# EAGLE board TSOC_PSoC4L (EAGLE 6.6.0)
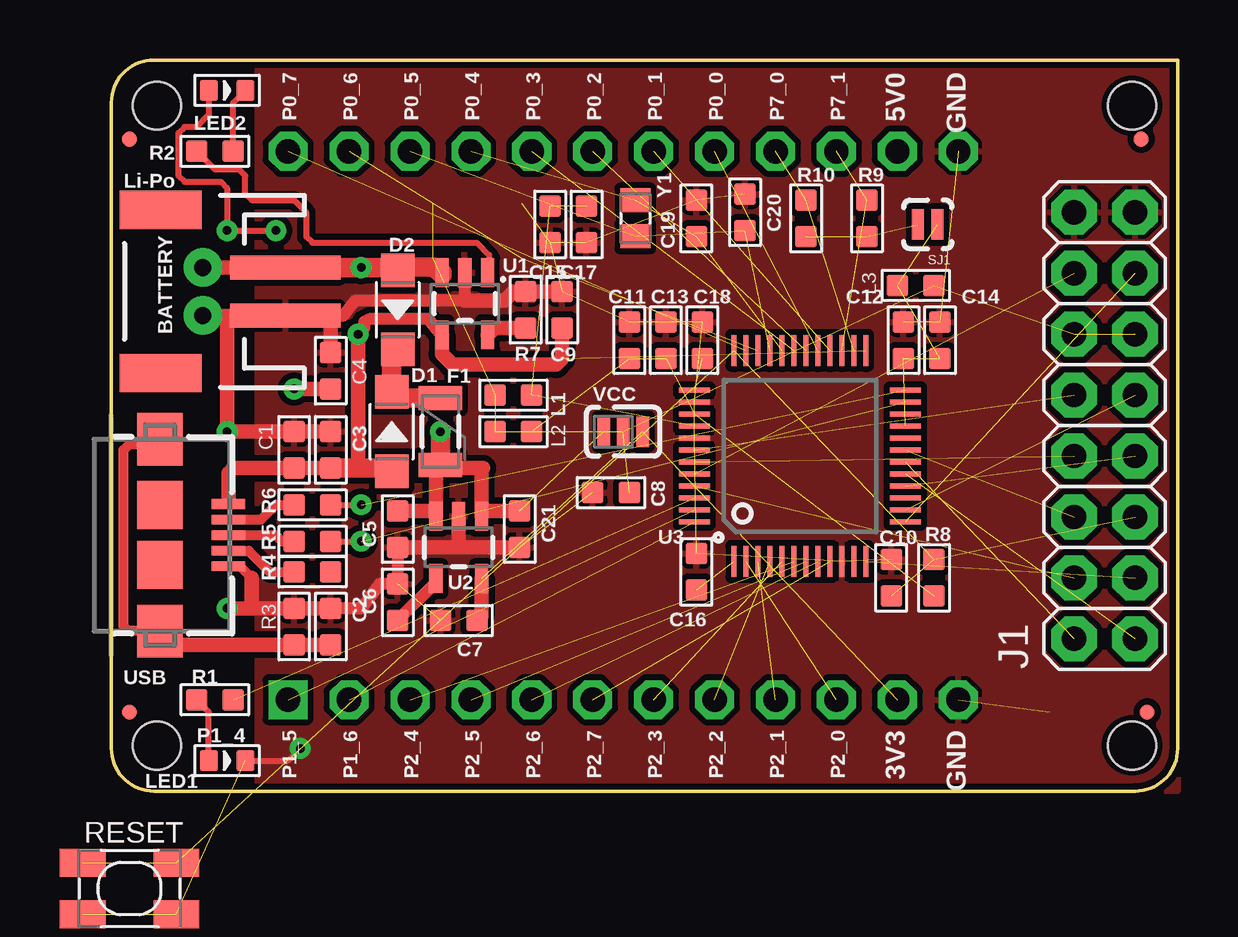
[diagram p0: board, top side]
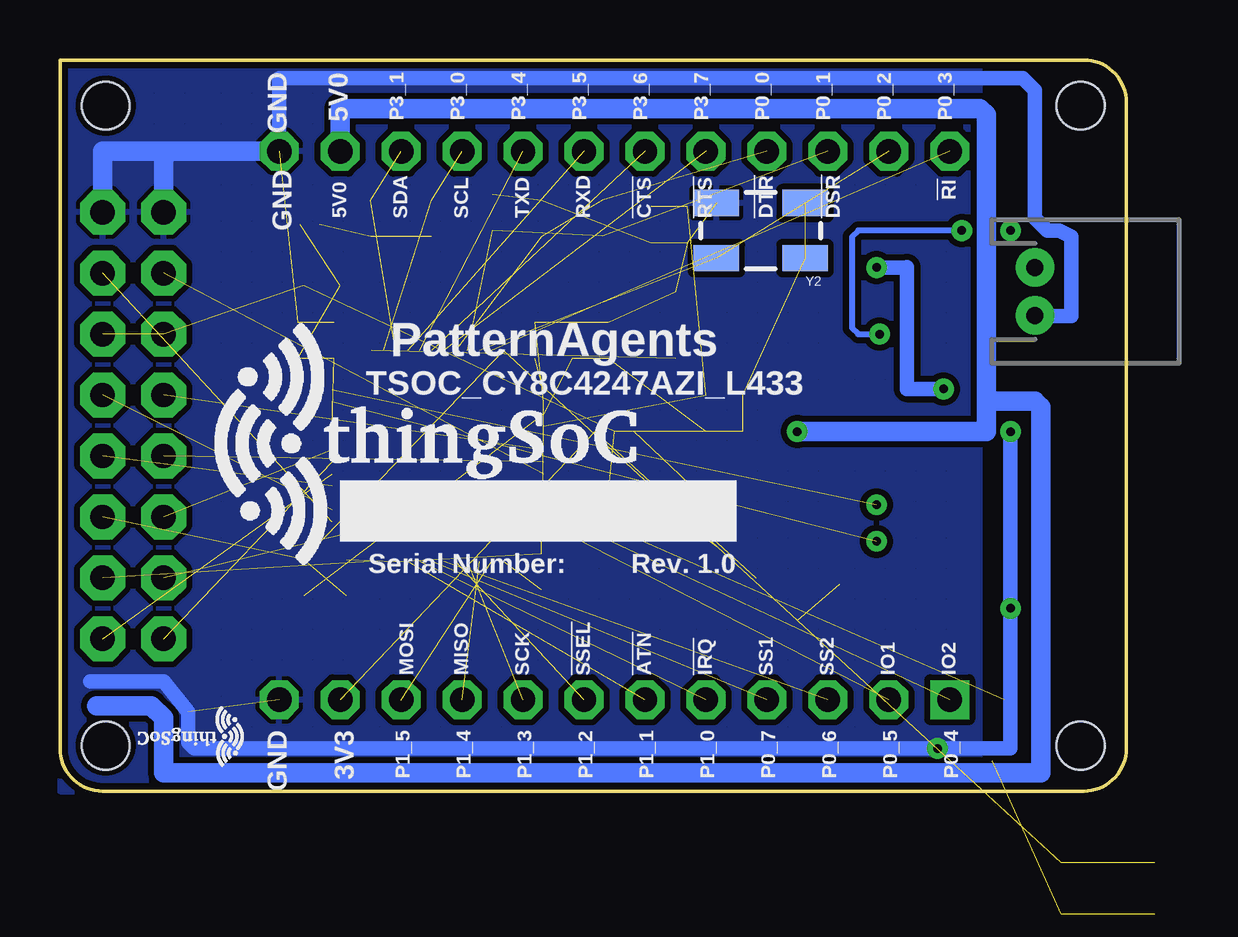
[diagram p1: board, bottom side, seen from below]

Size 44.45 x 30.48 mm. Coordinates in mm from the lower left corner, seen from the top.
Copper layers (1*16): Top 0.035mm / dielectric 1.5mm / Bottom 0.035mm
Design rules "PatternAgents_7mil": minimum track width 7mil, minimum drill 14mil, track to track 7mil, track to pad 7mil, pad to pad 7mil, via to via 7mil, smd to smd 7mil, copper to edge 7mil, drill to drill 7mil, minimum pad ring 12mil, minimum via ring 10mil, stop-mask expansion 4mil, vias tented up to drill 25mil, thermal gap 7mil
Net classes: 1 vcc: width 0.254 mm

## Footprints (pad centres in the part's own frame; a part is rotated, then mirrored left to right if it is on the bottom)
TSOC-BB-S24 = drill 1.016 square: 1B -11.43,11.43 | drill 1.016 octagon: 1C 11.43,11.43; 2B -11.43,8.89; 2C 11.43,8.89; 3B -11.43,6.35; 3C 11.43,6.35; 4B -11.43,3.81; 4C 11.43,3.81; 5B -11.43,1.27; 5C 11.43,1.27; 6B -11.43,-1.27; 6C 11.43,-1.27; 7B -11.43,-3.81; 7C 11.43,-3.81; 8B -11.43,-6.35; 8C 11.43,-6.35; 9B -11.43,-8.89; 9C 11.43,-8.89; 10B -11.43,-11.43; 10C 11.43,-11.43; 11B -11.43,-13.97; 11C 11.43,-13.97; 12B -11.43,-16.51; 12C 11.43,-16.51
JST-2-SMD = smd 1 x 4.6: 1 -1,-3.7; 2 1,-3.7 | smd 1.6 x 3.4: NC1 -3.4,1.5; NC2 3.4,1.5
C0603 = smd 0.889 x 0.889: 1 0,0.762; 2 0,-0.762
SOD-123 = smd 1.397 x 1.397: + -1.651,0; - 1.651,0
PTC-1206 = smd 1 x 1.8: 1 -1.4,0; 2 1.4,0
MICRO-FIDUCIAL = smd 0.635 x 0.635: 1 0,0
2X8 = drill 1.016 pad 1.88 octagon: 1 0,0; 2 0,2.54; 3 2.54,0; 4 2.54,2.54; 5 5.08,0; 6 5.08,2.54; 7 7.62,0; 8 7.62,2.54; 9 10.16,0; 10 10.16,2.54; 11 12.7,0; 12 12.7,2.54; 13 15.24,0; 14 15.24,2.54; 15 17.78,0; 16 17.78,2.54
JST-2-PTH-NS = drill 0.7 pad 1.6: 1 -1,0; 2 1,0
L0603 = smd 0.889 x 0.889: 1 -0.762,0; 2 0.762,0
LED-0603 = smd 0.762 x 0.889: + -0.762,0; - 0.762,0
R0603 = smd 0.889 x 0.889: 1 0,0.762; 2 0,-0.762
SW4-SMD-4.2X3.2X2.5MM = smd 1.905 x 1.168: 1 -1.95,1.075; 2 1.95,1.075; 3 -1.95,-1.075; 4 1.95,-1.075
JMP-2-NC = smd 0.508 x 1.27: 1 -0.401,0; 2 0.413,0
SOT23-5 = smd 0.55 x 1.2: 1 -0.95,-1.3; 2 0,-1.3; 3 0.95,-1.3; 4 0.95,1.3; 5 -0.95,1.3
TQFP-7X7-48 = smd 1.3 x 0.21: 1 -4.4,2.75; 2 -4.4,2.25; 3 -4.4,1.75; 4 -4.4,1.25; 5 -4.4,0.75; 6 -4.4,0.25; 7 -4.4,-0.25; 8 -4.4,-0.75; 9 -4.4,-1.25; 10 -4.4,-1.75; 11 -4.4,-2.25; 12 -4.4,-2.75; 25 4.4,-2.75; 26 4.4,-2.25; 27 4.4,-1.75; 28 4.4,-1.25; 29 4.4,-0.75; 30 4.4,-0.25; 31 4.4,0.25; 32 4.4,0.75; 33 4.4,1.25; 34 4.4,1.75; 35 4.4,2.25; 36 4.4,2.75 | smd 0.21 x 1.3: 13 -2.75,-4.4; 14 -2.25,-4.4; 15 -1.75,-4.4; 16 -1.25,-4.4; 17 -0.75,-4.4; 18 -0.25,-4.4; 19 0.25,-4.4; 20 0.75,-4.4; 21 1.25,-4.4; 22 1.75,-4.4; 23 2.25,-4.4; 24 2.75,-4.4; 37 2.75,4.4; 38 2.25,4.4; 39 1.75,4.4; 40 1.25,4.4; 41 0.75,4.4; 42 0.25,4.4; 43 -0.25,4.4; 44 -0.75,4.4; 45 -1.25,4.4; 46 -1.75,4.4; 47 -2.25,4.4; 48 -2.75,4.4
TSOC-BB-BRD-DIM = hole 2: 13.335,16.891; -13.335,16.891; 13.335,-23.749; -13.335,-23.749
USB-AB-MICRO-SMD = smd 1.4 x 0.4: D+ 2.85,0; D- 2.85,0.65; GND 2.85,-1.3; ID 2.85,-0.65; VBUS 2.85,1.3 | smd 1.9 x 2: P$6 0,1.25; P$7 0,-1.25 | smd 1.9 x 2.2: SHIELD1 0,4; SHIELD2 0,-4
JMP-3-1_2 = smd 0.508 x 1.27: 1 -0.813,0; 2 0,0; 3 0.813,0
X2-SMD-L2.0X1.2X0.55MM = smd 1 x 1.25: 1 -0.75,0; 2 0.75,0
CRYSTAL-SMD-5X3 = smd 1.9 x 1.1: 1 -1.85,-1.15; 2 1.85,-1.15; 3 1.85,1.15; 4 -1.85,1.15

## Placement (x,y rotation side)
A  TSOC-24-BB  [TSOC-BB-S24]  18.8,15.24 90 top
BATTERY  [JST-2-SMD]  3.56,20.83 90 top
C1  100nf  [C0603]  7.62,14.22 180 top
C2  100nf  [C0603]  9.14,6.86 180 top
C3  100nf  [C0603]  9.14,14.22 180 top
C4  1uf  [C0603]  9.14,17.53 180 top
C5  100nf  [C0603]  11.94,7.87 180 top
C6  10uf  [C0603]  11.94,10.92 0 top
C7  10uf  [C0603]  14.48,7.11 90 top
C8  10uf  [C0603]  20.83,12.45 90 top
C9  1uf  [C0603]  18.8,20.07 180 top
C10  100nf  [C0603]  32.51,8.89 180 top
C11  1uf  [C0603]  21.59,18.8 180 top
C12  100nf  [C0603]  33.02,18.8 180 top
C13  100nf  [C0603]  23.11,18.8 180 top
C14  1uf  [C0603]  34.54,18.8 180 top
C15  1uf  [C0603]  18.29,23.62 0 top
C16  1uf  [C0603]  24.38,9.14 180 top
C17  100nf  [C0603]  19.81,23.62 0 top
C18  1uf  [C0603]  24.64,18.8 180 top
C19  12pf  [C0603]  24.38,23.88 180 top
C20  12pf  [C0603]  26.42,24.13 180 top
C21  10uf  [C0603]  17.02,10.92 180 top
D1  20V-1A  [SOD-123]  11.68,14.99 90 top
D2  20V-1A  [SOD-123]  11.94,20.07 270 top
F1  500mA-PTC  [PTC-1206]  13.72,14.99 270 top
FID1  FIDUCIALUFIDUCIAL  [MICRO-FIDUCIAL]  0.76,3.3 180 top
FID2  FIDUCIALUFIDUCIAL  [MICRO-FIDUCIAL]  0.76,27.18 180 top
FID3  FIDUCIALUFIDUCIAL  [MICRO-FIDUCIAL]  43.18,3.3 180 top
FID4  FIDUCIALUFIDUCIAL  [MICRO-FIDUCIAL]  42.93,27.18 180 top
J1  [2X8]  42.67,6.35 90 top
J1P  [JST-2-PTH-NS]  3.81,20.83 270 bottom
L1  330OHM-500MA  [L0603]  16.76,16.51 0 top
L2  330OHM-500MA  [L0603]  16.76,14.99 0 top
L3  330OHM-500MA  [L0603]  33.53,21.08 180 top
LED1  GREEN-0603  [LED-0603]  4.83,1.27 0 top
LED2  YELLOW-0603  [LED-0603]  4.83,29.21 0 top
R1  1K 1/10W  [R0603]  4.32,3.81 90 top
R2  1K 1/10W  [R0603]  4.32,26.67 90 top
R3  1M 1/10W  [R0603]  7.62,6.86 180 top
R4  22R  [R0603]  8.38,9.14 90 top
R5  22R  [R0603]  8.38,10.41 90 top
R6  22R  [R0603]  8.38,11.94 90 top
R7  10K 1/10W  [R0603]  17.27,20.07 0 top
R8  10K 1/10W  [R0603]  34.29,8.89 0 top
R9  10K 1/10W  [R0603]  31.5,23.88 0 top
R10  10K 1/10W  [R0603]  28.96,23.88 0 top
RESET  DHT-4235A  [SW4-SMD-4.2X3.2X2.5MM]  0.76,-4.06 0 top
SJ1  JMP-2-NC  [JMP-2-NC]  34.04,23.62 180 top
U1  MCP73831  [SOT23-5]  14.73,20.32 180 top
U2  AP2112K-3.3V  [SOT23-5]  14.48,10.16 180 top
U3  CY8C4247AZI-L433  [TQFP-7X7-48]  28.7,13.97 90 top
U$6  TSOC-PCB-SINGLE  [TSOC-BB-BRD-DIM]  18.8,15.24 90 top
U$100  TSOC-LOGO-SMALL  [TSOC-LOGO-SML]  37.59,2.29 180 bottom
U$101  TSOC-LOGO-LRG  [TSOC-LOGO-LRG]  34.8,14.48 0 bottom
USB  USB_AB  [USB-AB-MICRO-SMD]  2.03,10.67 0 top
VCC  JMP-3-1_2  [JMP-3-1_2]  21.34,14.99 0 top
Y1  3.2768KHZ  [X2-SMD-L2.0X1.2X0.55MM]  21.84,23.88 270 top
Y2  OSCILLATOR5X3  [CRYSTAL-SMD-5X3]  15.24,23.37 180 bottom

## Library data of the parts
A U$6 U$100 U$101 = thingSoC
BATTERY = TSOC-ESP8266-BASE; BTM_NEG: -; BTM_POS: +; PROD_ID: CONN-11443; TOP_NEG: -; TOP_POS: +
C1-C3 C5 C10 C12 C13 C17 = Seeed-Capacitor-2016; MPN: CC0603KRX7R9BB104
C4 C9 C11 C14-C16 C18 = Seeed-Capacitor-2016; MPN: CC0603KRX7R8BB105
C6-C8 C21 = Seeed-Capacitor-2016; MPN: CC0603KRX5R6BB106
C19 C20 = Seeed-Capacitor-2016; MPN: CC0603JRNPO9BN120
D1 D2 = Seeed-Diode-2016; MPN: B5819W
F1 = SparkFun
FID1-FID4 J1P = TSOC-ESP8266-BASE
J1 = PatternAgents-ProtoPads
L1-L3 = Seeed-Inductor-2016; MPN: BLM18AG121SN1D
LED1 = Seeed-LED-2016; MPN: 19-217-G7C-AN1P2-3T
LED2 = Seeed-LED-2016; MPN: 19-217-Y5C-AM1N1VY-3T
R1 R2 = Seeed-Resistor-2016; MPN: RC0603JR-071KL
R3 = Seeed-Resistor-2016; MPN: RC0603JR-071ML
R4-R6 = Seeed-Resistor-2016; MPN: RC0603JR-0722RL
R7-R10 = Seeed-Resistor-2016; MPN: RC0603JR-0710KL
RESET = TSOC_GROVEY_WIFI; MPN: DHT-4235A
SJ1 VCC = PatternAgents-ProtoPads; BOM: EXCLUDE
U1 = TSOC-ESP8266-BASE; PROD_ID: IC-09995
U2 = SparkFun-PowerIC; PROD_ID: VREG-12457
U3 = PatternAgents-Cypress
USB = BeeSafe
Y1 = Seeed-Crystal Oscillator-2016; MPN: FC-12M
Y2 = SparkFun-FreqCtrl

## Nets
3V3: A.11B C7.2 U2.5 VCC.3
5V0: A.11C C6.1 C21.2 F1.2 U2.1 U2.3 VCC.1
!XRES: C10.1 J1.5 R8.1 RESET.1 RESET.2 U3.36
BYPASS1: C5.1 U2.4
CLED: LED2.- R2.2
CSTAT: R2.1 U1.1
GND: A.12B A.12C BATTERY.1 C1.2 C2.2 C3.2 C4.2 C5.2 C6.2 C7.1 C8.1 C9.2 C10.2 C11.2 C12.2 C13.2 C14.2 C15.2 C16.2 C17.2 C18.2 C19.2 C20.2 C21.1 J1.15 J1.16 J1P.2 LED1.- R3.2 R7.1 RESET.3 RESET.4 U1.2 U2.2 U3.10 U3.38 U3.41 USB.GND Y2.2
I2CPUP: R9.2 R10.2 SJ1.2
N$1: R7.2 U1.5
N$17: LED1.+ R1.1
P0_0: A.7C U3.28
P0_1: A.8C U3.29
P0_2: A.6C U3.30
P0_3: A.5C U3.31
P0_4: A.4C C19.1 U3.32 Y1.1
P0_5: A.3C C20.1 U3.33 Y1.2
P0_6: A.2C U3.34 Y2.3
P0_7: A.1C U3.35
P1_0: J1.10 U3.42
P1_1: J1.8 U3.43
P1_2: J1.14 U3.44
P1_3: J1.4 U3.45
P1_4: R1.2 U3.46
P1_5: A.1B U3.47
P1_6: A.2B U3.48
P1_7: C16.1 U3.1
P2_0: A.10B U3.2
P2_1: A.9B U3.3
P2_2: A.8B U3.4
P2_3: A.7B U3.5
P2_4: A.3B U3.6
P2_5: A.4B U3.7
P2_6: A.5B U3.8
P2_7: A.6B U3.9
P3_0: J1.3 U3.12
P3_1: J1.13 U3.13
P3_2: J1.9 U3.14
P3_3: J1.7 U3.16
P3_4: J1.1 U3.17
P3_5: J1.2 U3.18
P3_6: J1.6 U3.19
P3_7: U3.20
P4_0: U3.22
P7_0: A.9C R10.1 U3.26
P7_1: A.10C R9.1 U3.27
USB1_DM: R6.2 U3.24
USB1_DP: R5.2 U3.23
USB1_I: R4.1 USB.ID
USB1_ID: R4.2
USB1_M: R6.1 USB.D-
USB1_P: R5.1 USB.D+
USB1_SHIELD: C2.1 R3.1 USB.SHIELD1 USB.SHIELD2
VBAT: BATTERY.2 C4.1 D2.+ J1P.1 U1.3
VBUS: C1.1 C3.1 C9.1 D1.+ LED2.+ U1.4 U3.25 USB.VBUS
VCC: C8.2 J1.11 J1.12 L1.1 L2.1 L3.1 VCC.2 Y2.1 Y2.4
VCCD: C18.1 U3.37
VDDA: C15.1 C17.1 L1.2 U3.40
VDDD: C11.1 C13.1 L2.2 R8.2 U3.39
VDDIO: C12.1 C14.1 L3.2 SJ1.1 U3.21
VIN: D1.- D2.- F1.1

## Tracks (layer width: path | path; a pad name or v marks a point on that pad's centre or on a via)
3V3  (2 unrouted)
  Top 0.61: U2.5 15.43,7.3 C7.2
5V0  (via drill 0.36)  (1 unrouted)
  Top 0.61: C6.1 13.5,11.68 U2.3 13.53,13.4 F1.2 13.84,13.46 15.49,13.46 15.43,13.4 U2.1 15.65,11.68 C21.2
  Top 0.813: F1.2 v13.72,14.99
  Bottom 0.813: v13.72,14.99 5.84,14.99 5.84,16.26 | 5.84,16.26 5.84,28.19 6.1,28.45 32.77,28.45 A.11C | 42.93,3.56 40.64,3.56 40.13,3.05 40.13,0.76 3.56,0.76 3.56,16 3.81,16.26 5.84,16.26
!XRES  (5 unrouted)
BYPASS1
  Top 0.508: U2.4 13.53,8.7 C5.1
CLED
  Top 0.254: R2.2 5.08,28.7 LED2.-
CSTAT
  Top 0.254: U1.1 15.75,21.69 15.75,22.35 15.24,22.86 8.38,22.86 8.13,23.11 8.13,24.13 7.62,24.64 5.84,24.64 5.59,24.89 5.59,25.65 5.33,25.91 4.32,25.91 R2.1
GND  (via drill 0.36)  (20 unrouted)
  Top 0.254: LED1.- 7.37,1.27 v7.87,1.78
  Top 0.406: USB.GND 5.36,9.37 5.84,8.89
  Top 0.508: U1.2 14.73,20.45 10.16,20.45 9.65,19.81 9.14,19.81 | C6.2 C5.2 11.18,8.64 10.41,7.62 C2.2
  Top 0.61: 5.84,8.89 5.84,7.62 | C2.2 R3.2 5.84,7.62 | C1.2 C3.2 v4.83,14.99 4.83,19.81 | C4.2 9.14,19.81 7.27,19.81 BATTERY.1 7.24,19.81 4.83,19.81 | 14.73,20.45 16.38,20.45 16.76,20.83 R7.1 C9.2 | 4.83,19.81 3.83,19.81 J1P.2 | 5.84,7.62 v4.83,7.62 | C6.2 14.48,10.16 | 14.48,10.16 U2.2 | C21.1 14.48,10.16
  Bottom 0.61: 3.83,19.81 J1P.2 3.79,19.81 2.29,19.81 2.29,23.11 2.79,23.37 3.3,23.37 3.81,23.88 3.81,29.21 4.32,29.72 35.31,29.72 A.12C | 43.18,4.57 40.13,4.57 39.12,3.3 39.12,2.03 38.86,1.78 v7.87,1.78 4.83,1.78 v4.83,7.62 v4.83,14.99
  Bottom 0.813: A.12C 39.88,26.67 | 39.88,26.67 42.67,26.67 J1.15 | J1.16 40.13,26.42 39.88,26.67
  pour Top (isolate 0.254, hatched): 44.45,30.48 44.45,0 6.1,0 6.1,30.48
  pour Bottom (isolate 0.254, hatched): 44.45,30.48 44.45,0 6.1,0 6.1,30.48
I2CPUP  (2 unrouted)
N$1
  Top 0.61: R7.2 15.97,19.3 U1.5
N$17
  Top 0.254: LED1.+ 4.06,3.3 R1.1
P0_0  (1 unrouted)
P0_1  (1 unrouted)
P0_2  (1 unrouted)
P0_3  (1 unrouted)
P0_4  (3 unrouted)
P0_5  (3 unrouted)
P0_6  (2 unrouted)
P0_7  (1 unrouted)
P1_0  (1 unrouted)
P1_1  (1 unrouted)
P1_2  (1 unrouted)
P1_3  (1 unrouted)
P1_4  (1 unrouted)
P1_5  (1 unrouted)
P1_6  (1 unrouted)
P1_7  (1 unrouted)
P2_0  (1 unrouted)
P2_1  (1 unrouted)
P2_2  (1 unrouted)
P2_3  (1 unrouted)
P2_4  (1 unrouted)
P2_5  (1 unrouted)
P2_6  (1 unrouted)
P2_7  (1 unrouted)
P3_0  (1 unrouted)
P3_1  (1 unrouted)
P3_2  (1 unrouted)
P3_3  (1 unrouted)
P3_4  (1 unrouted)
P3_5  (1 unrouted)
P3_6  (1 unrouted)
P7_0  (2 unrouted)
P7_1  (2 unrouted)
USB1_DM  (via drill 0.36)  (1 unrouted)
  Top 0.254: R6.2 v10.41,11.94
USB1_DP  (via drill 0.36)  (1 unrouted)
  Top 0.254: R5.2 v10.41,10.41
USB1_I
  Top 0.406: USB.ID 5.73,10.02 6.6,9.14 R4.1
USB1_M
  Top 0.406: USB.D- 6.24,11.32 6.86,11.94 R6.1
USB1_P
  Top 0.406: USB.D+ 6.86,10.67 7.11,10.41 R5.1
USB1_SHIELD
  Top 0.406: USB.SHIELD2 0.7,6.67 0.51,6.86 0.51,14.22 0.76,14.48 1.84,14.48
  Top 0.61: C2.1 R3.1 2.6,6.1 USB.SHIELD2 | 1.84,14.48 USB.SHIELD1
VBAT  (via drill 0.36)
  Top 0.61: C4.1 v7.62,16.76 | BATTERY.2 J1P.1
  Top 0.813: BATTERY.2 v10.41,21.83 11.57,21.83 D2.+ 11.81,21.84 13.46,21.84 13.78,21.52 U1.3
  Bottom 0.61: v10.41,21.83 9.16,21.83 9.14,21.84 C4.1 v7.62,16.76
VBUS  (via drill 0.36)  (1 unrouted)
  Top 0.254: v6.86,23.37 v4.83,23.37 4.83,25.15 4.57,25.4 3.05,25.4 2.79,25.65 2.79,27.43 3.05,27.69 3.56,27.69 4.06,28.19 LED2.+
  Top 0.406: USB.VBUS 4.88,12.19
  Top 0.508: U1.4 13.75,19.02 13.21,19.68 10.79,19.68 10.54,19.56 10.54,19.3 v10.29,19.05
  Top 0.61: C3.1 C1.1 5.08,13.46 4.88,13.26 4.88,12.19 | C9.1 18.8,18.03 18.54,17.78 14.22,17.78 13.78,18.22 U1.4 | v10.29,19.05 10.29,13.59 10.41,13.46
  Top 0.813: C3.1 10.41,13.46 11.3,13.46 D1.+
  Bottom 0.254: v10.29,19.05 11.18,19.05 11.43,19.3 11.43,23.11 11.18,23.37 v6.86,23.37
VCC  (8 unrouted)
VCCD  (1 unrouted)
VDDA  (3 unrouted)
VDDD  (4 unrouted)
VDDIO  (4 unrouted)
VIN
  Top 0.813: F1.1 11.68,16.39 D1.- 11.68,18.16 D2.-

## Text on the board
tPlace: P0_7 | P0_6 | P0_5 | P0_4 | P0_3 | P0_2 | P0_1 | P0_0 | P7_0 | P7_1 | 5V0 | GND | Li-Po | P1_5 | P1_6 | P2_4 | P2_5 | P2_6 | P2_7 | P2_3 | P2_2 | P2_1 | P2_0 | 3V3 | GND | P1_4
bPlace: P0_3 | P0_2 | P0_1 | P0_0 | P3_7 | P3_6 | P3_5 | P3_4 | P3_0 | P3_1 | 5V0 | GND | !RI | !DSR | !DTR | !RTS | !CTS | RXD | TXD | SCL | SDA | 5V0 | GND | PatternAgents | TSOC_CY8C4247AZI_L433 | Rev. 1.0 | Serial Number: | IO2 | IO1 | SS2 | SS1 | !IRQ | !ATN | !SSEL | SCK | MISO | MOSI | P0_4 | P0_5 | P0_6 | P0_7 | P1_0 | P1_1 | P1_2 | P1_3 | P1_4 | P1_5 | 3V3 | GND